# EAGLE board 6ButtonSMD (EAGLE 9.6.2)
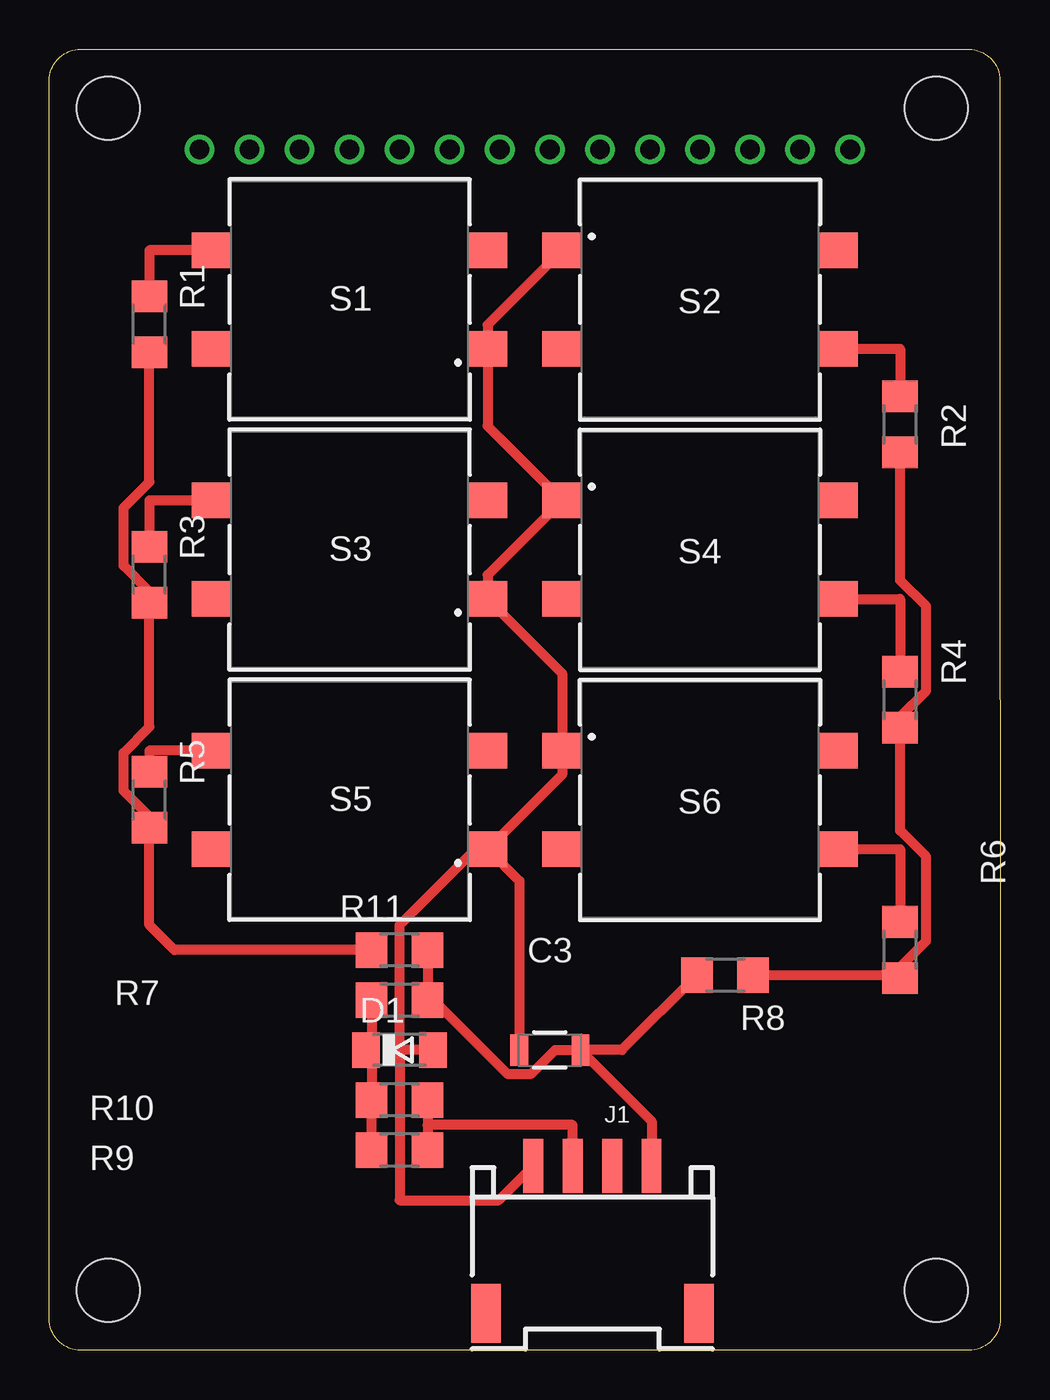
[diagram p0: board, top side]

Size 48.26 x 66.04 mm. Coordinates in mm from the lower left corner, seen from the top.
Outline: 0,1.6 0,64.44 arc-90 1.6,66.04 46.64,66.04 arc-90 48.24,64.44 48.26,1.6 arc-90 46.66,0 1.6,0 arc-90 0,1.6
Copper layers (1*16): Top 0.035mm / dielectric 1.5mm / Bottom 0.035mm
Design rules "default *": minimum track width 6mil, minimum drill 0.35mm, track to track 6mil, track to pad 6mil, pad to pad 6mil, via to via 6mil, smd to smd 6mil, copper to edge 10mil, drill to drill 6mil, minimum pad ring 10mil, minimum via ring 8mil, stop-mask expansion 4mil, vias tented up to drill 0mil, thermal gap 10mil
Holes 3.2 mm at 3,63.04 45,63.04 45,3.04 3,3.04

## Footprints (pad centres in the part's own frame; a part is rotated, then mirrored left to right if it is on the bottom)
WCAP-CSGP_1206_H0.8 = smd 0.9 x 1.6: 1 -1.55,0; 2 1.55,0
SOD80C = smd 1.4 x 1.8: A 1.7,0; C -1.7,0
HW4-SMD-2.0-90D = smd 1.01 x 2.74: 1 -3,-0.1; 2 -1,-0.1; 3 1,-0.1; 4 3,-0.1 | smd 1.5 x 3: SS1 -5.4,7.4; SS2 5.4,7.4
R1206 = smd 1.6 x 1.803: 1 -1.422,0; 2 1.422,0
430162073826 = smd 2 x 1.8: 1 -7,2.5; 2 7,2.5; 3 -7,-2.5; 4 7,-2.5

## Placement (x,y rotation side)
C3  47nF  [WCAP-CSGP_1206_H0.8]  25.4,15.24 0 top
D1  3.3V  [SOD80C]  17.78,15.24 0 top
J1  4P-SMD-2.0-90D  [HW4-SMD-2.0-90D]  27.56,9.27 180 top
R1  27K  [R1206]  5.08,52.07 270 top
R2  15K  [R1206]  43.18,46.99 270 top
R3  9.1K  [R1206]  5.08,39.37 270 top
R4  5.6K  [R1206]  43.18,33.02 270 top
R5  3.3K  [R1206]  5.08,27.94 270 top
R6  1.3K  [R1206]  43.18,20.32 270 top
R7  10K  [R1206]  17.78,17.78 180 top
R8  0  [R1206]  34.29,19.05 180 top
R9  1.3K  [R1206]  17.78,10.16 0 top
R10  1.3K  [R1206]  17.78,12.7 0 top
R11  0  [R1206]  17.78,20.32 0 top
S1  430162073826  [430162073826]  15.24,53.34 180 top
S2  430162073826  [430162073826]  33.02,53.34 0 top
S3  430162073826  [430162073826]  15.24,40.64 180 top
S4  430162073826  [430162073826]  33.02,40.64 0 top
S5  430162073826  [430162073826]  15.24,27.94 180 top
S6  430162073826  [430162073826]  33.02,27.94 0 top

## Library data of the parts
C3 = Wurth_Capacitors_WCAP-CSGP; CERAMIC-TYPE: X7R Class II; DATASHEET-URL: https://www.we-online.com/redexpert/spec/885012208085?ae; DF: 2.5%; HEIGHT: 0.8mm; MOUNT: SMT; OPERATING-TEMPERATURE: -55 up to +125 °C; PART-NUMBER: 885012208085; QMIN: -; RISO: 10GOhm; SIZE: 1206; TECHNICAL-REFERENCE: X7R1206473K050DFCT1000; VR: 50V(DC)
D1 = diode
J1 = OPL_Connector
R1-R11 = rcl; SPICEPREFIX: R
S1-S6 = Wurth_Switch_WS-TASV; DATASHEET-URL: https://www.we-online.com/redexpert/spec/430162073826?ae; H: 7.3mm; OPERATION-FORCE: 260g; PART-NUMBER: 430162073826; QTY: 250

## Nets
+3V3: D1.C R7.2 R9.1 R10.1
+5V: J1.3 R9.2 R10.2
A: C3.2 J1.1 R7.1 R8.2 R11.2
B: J1.2
GND: C3.1 D1.A J1.4 S1.1 S2.1 S3.1 S4.1 S5.1 S6.1
N$1: R1.1 S1.4
N$2: R2.1 S2.4
N$3: R3.1 S3.4
N$4: R4.1 S4.4
N$5: R5.1 S5.4
N$6: R6.1 S6.4
N$27: R2.2 R4.2 R6.2 R8.1
N$30: R1.2 R3.2 R5.2 R11.1

## Tracks (layer width: path | path; a pad name or v marks a point on that pad's centre or on a via)
+3V3
  Top 0.508: R9.1 R10.1 16.36,14.96 D1.C 16.36,15.52 R7.2
+5V
  Top 0.508: R10.2 19.2,11.43 | 19.2,11.43 R9.2 | J1.3 26.56,11.43 19.2,11.43
A
  Top 0.508: C3.2 30.56,11.63 J1.1 | R8.2 29.06,15.24 C3.2 | R11.2 R7.1 19.48,17.78 23.23,14.03 24.47,14.03 25.68,15.24 C3.2
GND
  Top 0.508: S2.1 22.24,52.06 S1.1 22.24,46.92 S4.1 22.24,39.36 S3.1 26.02,34.36 S6.1 26.02,29.22 S5.1 | S5.1 23.85,23.83 C3.1 | D1.A 17.78,15.24 | 17.78,15.24 17.78,7.62 22.81,7.62 J1.4 | 17.78,15.24 17.78,21.59 21.63,25.44 S5.1
N$1
  Top 0.508: S1.4 5.08,55.84 R1.1
N$2
  Top 0.508: S2.4 43.18,50.84 R2.1
N$3
  Top 0.508: S3.4 5.08,43.14 R3.1
N$4
  Top 0.508: S4.4 43.18,38.14 R4.1
N$5
  Top 0.508: S5.4 5.08,30.44 R5.1
N$6
  Top 0.508: S6.4 43.18,25.44 R6.1
N$11  (via drill 1)
  other vias: 7.62,60.96
N$12  (via drill 1)
  other vias: 10.16,60.96
N$13  (via drill 1)
  other vias: 12.7,60.96
N$14  (via drill 1)
  other vias: 15.24,60.96
N$15  (via drill 1)
  other vias: 17.78,60.96
N$16  (via drill 1)
  other vias: 20.32,60.96
N$17  (via drill 1)
  other vias: 22.86,60.96
N$18  (via drill 1)
  other vias: 25.4,60.96
N$19  (via drill 1)
  other vias: 27.94,60.96
N$20  (via drill 1)
  other vias: 30.48,60.96
N$21  (via drill 1)
  other vias: 33.02,60.96
N$22  (via drill 1)
  other vias: 35.56,60.96
N$23  (via drill 1)
  other vias: 38.1,60.96
N$24  (via drill 1)
  other vias: 40.64,60.96
N$27
  Top 0.508: R8.1 43.03,19.05 R6.2 43.18,19.47 44.49,20.77 44.49,25.07 43.18,26.37 R4.2 43.18,32.17 44.49,33.47 44.49,37.77 43.18,39.07 R2.2
N$30
  Top 0.508: R11.1 6.35,20.32 5.08,21.59 R5.2 5.08,27.09 3.77,28.39 3.77,30.33 5.08,31.64 R3.2 5.08,38.52 3.77,39.82 3.77,42.77 5.08,44.07 R1.2